# Altium PCB Power_Box_V2.PcbDoc (part 3 of 3)
Units mm, origin at the board's own origin, x right, y up, seen from the top; angles counter-clockwise.
Board outline 100 x 80 mm, 4 copper layers (Top Layer, Mid-Top, Mid-Bottom, Bottom Layer), stack 0.603 mm thick; 240 components, 204 nets, 825 pads, 313 vias.
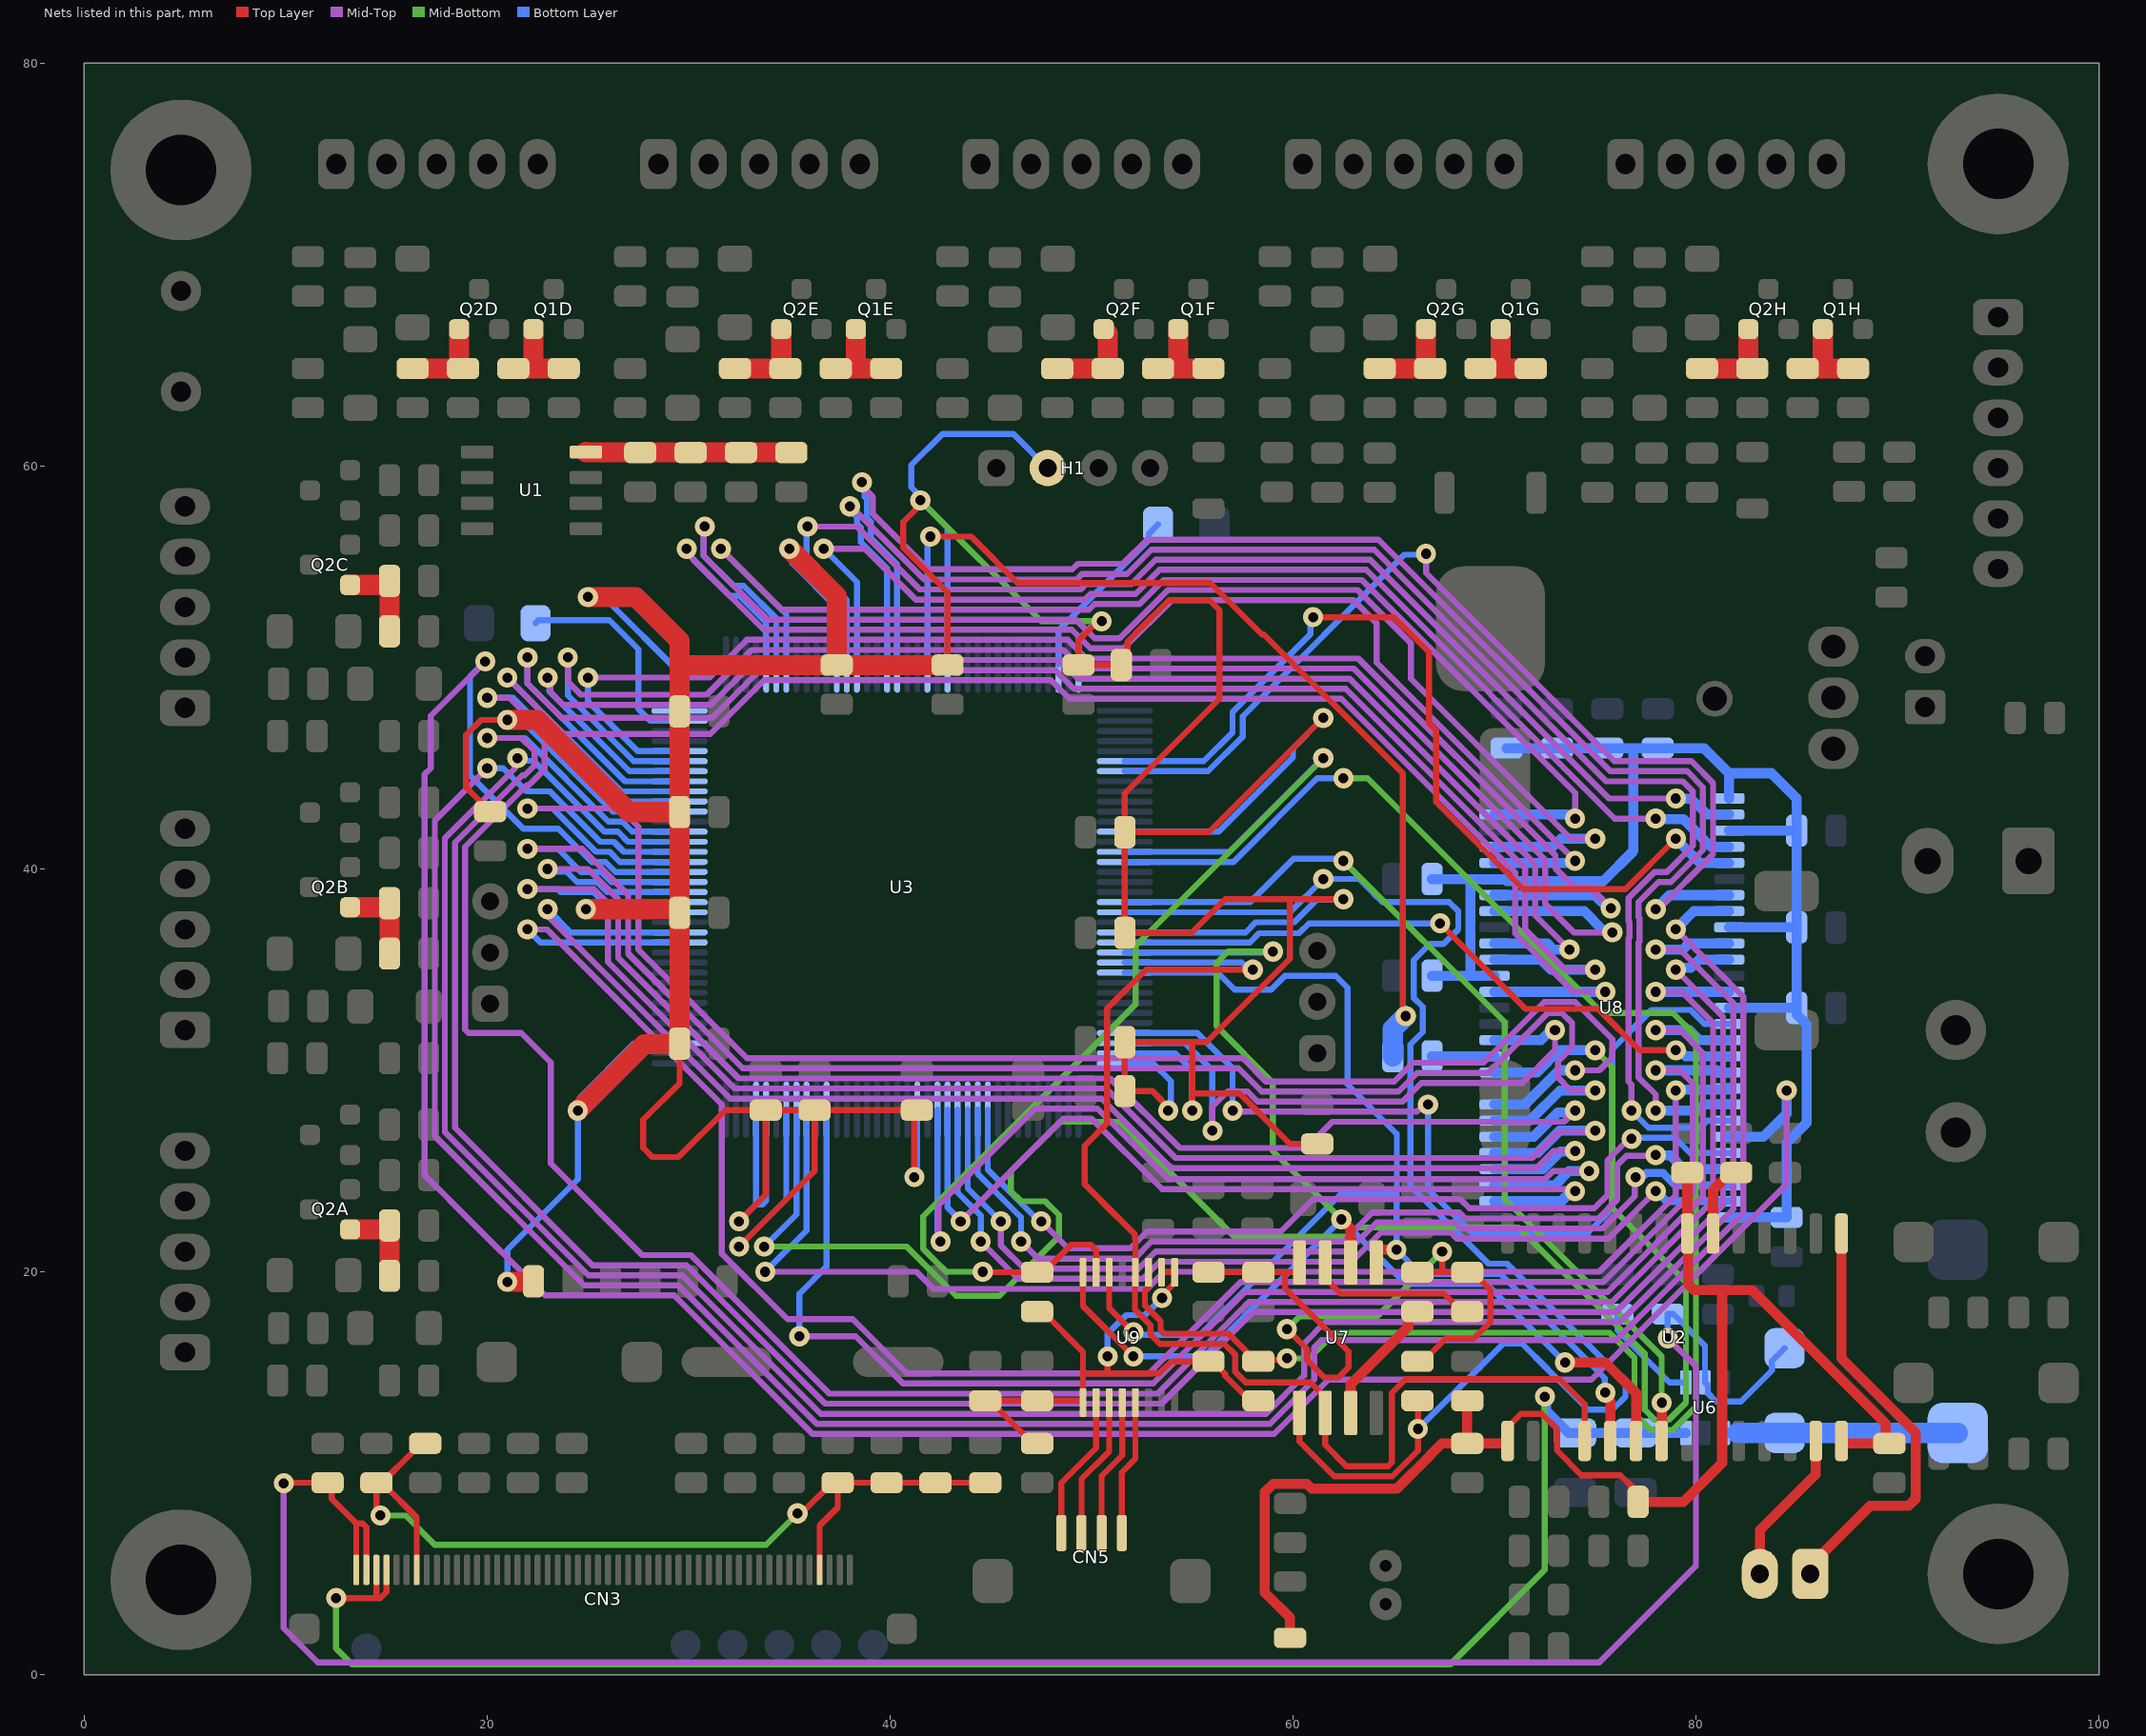
[diagram p5: the nets of this part, all layers, seen from the top]

## Via types
v1: diameter 1, hole 0.5, Top Layer to Bottom Layer, 226 vias
v2: diameter 1, hole 0.5, Top Layer to Bottom Layer, tented top, 87 vias

## Nets (pads, with @x,y where several pads share a name; then routed paths per layer and width w, separated by ;. In a path a pad name is that pad's centre, name@x,y a point inside that pad or via, vN(x,y) a via of type N, cw(c..) or ccw(c..) an arc to the next point about the centre after c; other vN are vias at no path point) (continued)
NetQ1D_2: Q1D.2 R2D.1 R3D.1 | length 4.5
  Top Layer w1: R2D.1@21.3,64.85 22.3,64.85 ; Q1D.2@22.3,66.8 22.3,64.85 ; R3D.1@23.8,64.85 22.3,64.85
NetQ1E_2: Q1E.2 R2E.1 R3E.1 | length 4.5
  Top Layer w1: R2E.1@37.3,64.85 38.3,64.85 ; Q1E.2@38.3,66.8 38.3,64.85 ; R3E.1@39.8,64.85 38.3,64.85
NetQ1F_2: Q1F.2 R2F.1 R3F.1 | length 4.5
  Top Layer w1: R2F.1@53.3,64.85 54.3,64.85 ; Q1F.2@54.3,66.8 54.3,64.85 ; R3F.1@55.8,64.85 54.3,64.85
NetQ1G_2: Q1G.2 R2G.1 R3G.1 | length 4.5
  Top Layer w1: R2G.1@69.3,64.85 70.3,64.85 ; Q1G.2@70.3,66.8 70.3,64.85 ; R3G.1@71.8,64.85 70.3,64.85
NetQ1H_2: Q1H.2 R2H.1 R3H.1 | length 4.5
  Top Layer w1: R2H.1@85.3,64.85 86.3,64.85 ; Q1H.2@86.3,66.8 86.3,64.85 ; R3H.1@87.8,64.85 86.3,64.85
NetQ2A_2: Q2A.2 R4A.2 R5A.2 | length 4.5
  Top Layer w1: Q2A.2@13.2,22.1 15.125,22.1 R4A.2@15.15,22.125 ; R5A.2@15.15,19.8 R4A.2@15.15,22.125 ; R4A.2@15.15,22.3 R4A.2@15.15,22.125
NetQ2B_2: Q2B.2 R4B.2 R5B.2 | length 4.5
  Top Layer w1: Q2B.2@13.2,38.1 15.125,38.1 R4B.2@15.15,38.125 ; R5B.2@15.15,35.8 R4B.2@15.15,38.125 ; R4B.2@15.15,38.3 R4B.2@15.15,38.125
NetQ2C_2: Q2C.2 R4C.2 R5C.2 | length 4.5
  Top Layer w1: Q2C.2@13.2,54.1 15.125,54.1 R4C.2@15.15,54.125 ; R5C.2@15.15,51.8 R4C.2@15.15,54.125 ; R4C.2@15.15,54.3 R4C.2@15.15,54.125
NetQ2D_2: Q2D.2 R4D.2 R5D.2 | length 4.5
  Top Layer w1: R5D.2@16.3,64.85 R4D.2@18.625,64.85 ; Q2D.2@18.6,66.8 18.6,64.875 R4D.2@18.625,64.85 ; R4D.2@18.8,64.85 R4D.2@18.625,64.85
NetQ2E_2: Q2E.2 R4E.2 R5E.2 | length 4.5
  Top Layer w1: R5E.2@32.3,64.85 R4E.2@34.625,64.85 ; Q2E.2@34.6,66.8 34.6,64.875 R4E.2@34.625,64.85 ; R4E.2@34.8,64.85 R4E.2@34.625,64.85
NetQ2F_2: Q2F.2 R4F.2 R5F.2 | length 4.7
  Top Layer w1: R5F.2@48.3,64.85 R4F.2@50.8,64.85 ; Q2F.2@50.6,66.8 50.8,66.6 R4F.2@50.8,64.85 ; R4F.2@50.975,64.85 R4F.2@50.8,64.85
NetQ2G_2: Q2G.2 R4G.2 R5G.2 | length 4.5
  Top Layer w1: R5G.2@64.3,64.85 R4G.2@66.625,64.85 ; Q2G.2@66.6,66.8 66.6,64.875 R4G.2@66.625,64.85 ; R4G.2@66.8,64.85 R4G.2@66.625,64.85
NetQ2H_2: Q2H.2 R4H.2 R5H.2 | length 4.5
  Top Layer w1: R5H.2@80.3,64.85 R4H.2@82.625,64.85 ; Q2H.2@82.6,66.8 82.6,64.875 R4H.2@82.625,64.85 ; R4H.2@82.8,64.85 R4H.2@82.625,64.85
NetR13_1: R13.1 U2.20 | length 3.7
  Top Layer w0.5: U2.20@80.85,21.9 80.85,24.05 81.725,24.925 R13.1@82,24.925
NetR53_1: R53.1 U6.4 | length 5.3
  Bottom Layer w0.3: R53.1@76.1,17.9 76.1,17.1 78.69,14.51 U6.4@79.5,14.51
NetR56_1: R56.1 U3.129 U7.1 | length 73.4
  Top Layer w0.3: U7.1@60.322,12.998 60.322,11.578 62.05,9.85 64.931,9.85 66.2,11.119 66.2,13.575 R56.1@66.175,13.6
  Bottom Layer w0.3: U3.129@51.65,37.85 59.85,37.85 v1(61.5,39.5) 63.3,39.5 64.017,38.783 64.017,38.767 64.434,38.35 67.75,38.35 68.2,37.9 68.2,36.998 67.472,36.27 66.803,36.27 66,35.466 66,33.591 66.44,33.151 66.44,31.906 65.825,31.291 65.825,24.275 69.7,20.4 70.625,20.4 76.5,14.525 76.5,13.798 75.852,13.15 74.652,13.15 73.152,14.65 73.148,14.65 72.65,15.148 72.65,15.152 71.352,16.45 70.45,16.45 v2(66.2,12.2)
NetR57_1: R57.1 U7.3 | length 6.5
  Top Layer w0.5: U7.3@62.862,12.998 62.862,14.412 65.721,17.271 65.721,17.658 66.087,18.025 R57.1@66.175,18.025
NetR58_1: R58.1 U7.7 | length 8.5
  Top Layer w0.3: U7.7@61.592,20.452 61.592,19.677 62.353,18.916 67.485,18.916 68.377,18.025 R58.1@68.652,18.025
NetR59_1: R59.1 U3.93 | length 49.1
  Top Layer w0.3: v1(42,56.5) 44.025,56.5 46.325,54.2 55.898,54.2 58.448,51.65 58.552,51.65 65.45,44.752 65.45,33.493 65.456,33.487 65.456,32.829 v1(65.59,32.695)
  Bottom Layer w0.3: U3.93@41.85,50.15 41.85,56.161 42,56.311 v1(42,56.5)
  Bottom Layer w1: R59.1@64.95,30.7 64.95,32.055 v1(65.59,32.695)
NetR59_2: R59.2 U8.38 | length 3.1
  Bottom Layer w0.5: R59.2@66.9,30.7 U8.38@70,30.7
NetR60_1: R60.1 U3.124 U9.11 | length 89
  Top Layer w0.3: U9.11@52.825,19.975 52.8,19.95 52.8,19.202 52.65,19.052 52.65,18.334 53.425,17.559 53.425,17.101 53.601,16.925 56.798,16.925 57.696,16.027 57.696,15.917 58.062,15.55 R60.1@58.277,15.55 58.351,15.625 59.625,15.625 v2(59.7,15.7)
  Mid-Bottom w0.3: v2(59.7,15.7) 60.798,15.7 62.073,16.975 75.707,16.975 76.95,15.732 76.95,12.941 77.741,12.15 78.859,12.15 80,13.291 80,31.7 78.85,32.85 75.348,32.85 63.698,44.5 v1(62.5,44.5)
  Bottom Layer w0.3: U3.124@51.65,40.35 57.042,40.35 61.192,44.5 v1(62.5,44.5)
NetR61_1: R61.1 U3.123 U9.15 | length 55.2
  Top Layer w0.3: v1(44.6,20) 44.625,19.975 47.625,19.975 49,21.35 49.95,21.35 50.225,21.075 U9.15@50.225,19.975
  Mid-Bottom w0.3: v1(44.6,20) 42.782,20 41.65,21.132 41.65,22.75 52.183,33.283 52.183,36.183 v1(61.5,45.5)
  Bottom Layer w0.3: U3.123@51.65,40.85 56.835,40.85 61.485,45.5 v1(61.5,45.5)
NetU2_4: U2.4 U3.134 U7.2 U9.12 | length 64.9
  Top Layer w0.3: v1(58,35) 52.7,35 50.775,33.075 50.775,27.375 49.65,26.25 49.65,24.35 50.45,23.55 50.45,23.548 52.15,21.848 52.15,21.626 52.175,21.601 U9.12@52.175,19.975 52.15,19.95 52.15,18.141 52.175,18.116 52.175,18.102 52.925,17.352 52.925,16.894 53.394,16.425 56.591,16.425 57.127,15.89 57.127,15.034 57.661,14.5 60.864,14.5 61.592,13.773 61.592,11.408 62.65,10.35 64.724,10.35 64.9,10.526 64.9,13.991 65.584,14.675 73.225,14.675 74.475,13.425 U2.4@74.475,11.6
  Bottom Layer w0.3: U3.134@51.65,35.35 57.461,35.35 57.811,35 v1(58,35)
NetU2_5: U2.5 U3.135 U7.5 U9.14 | length 63.2
  Top Layer w0.3: U9.14@50.875,19.975 50.875,18.2 v2(52.075,17)
  Top Layer w0.5: U7.5@64.132,20.452 64.132,20.917 64.307,21.092 v2(65.134,21.092) ; v1(75.5,14) 75.5,13.811 75.75,13.561 U2.5@75.75,11.6
  Bottom Layer w0.3: U3.135@51.65,34.85 56.25,34.85 57.1,34 58.91,34 59.6,34.69 62.11,34.69 62.7,34.1 62.7,29.302 65.15,26.852 65.15,23.816 65.134,23.8 65.134,23.679 ; v2(52.075,17) 52.209,16.866 55.373,16.866 62.307,23.8 65.013,23.8 65.134,23.679 ; v1(75.5,14) 75.479,14.021 75.479,14.723 73.852,16.35 73.843,16.35 70.293,19.9 66.326,19.9 v2(65.134,21.092) 65.134,23.679
NetU2_6: U2.6 U3.133 U7.6 U9.16 | length 67
  Top Layer w0.3: U9.16@49.575,19.975 49.575,18.298 52.073,15.8 v1(52.075,15.8)
  Top Layer w0.5: v2(62.4,22.6) 62.862,22.138 U7.6@62.862,20.452 ; v1(73.5,15.5) 75.5,15.5 77.025,13.975 U2.6@77.025,11.6
  Mid-Bottom w0.3: v1(59,35.9) 56.776,35.9 56.2,35.324 56.2,32.2 59,29.4 59,26 v2(62.4,22.6)
  Bottom Layer w0.3: U3.133@51.65,35.85 58.95,35.85 v1(59,35.9) ; v1(52.075,15.8) 55.6,15.8 v2(62.4,22.6) 65.6,19.4 69.6,19.4 71.726,17.274 v1(73.5,15.5)
NetU2_7: U2.7 U3.128 | length 47.1
  Top Layer w0.5: U2.7@78.3,11.6 v2(78.3,13.5)
  Mid-Bottom w0.3: v1(62.5,40.4) 70.5,32.4 70.5,23.598 78.3,15.798 v2(78.3,13.5)
  Bottom Layer w0.3: U3.128@51.65,38.35 57.871,38.35 60.021,40.5 62.4,40.5 v1(62.5,40.4)
NetU3_10: U3.10 U8.23 | length 45.3
  Mid-Top w0.3: v1(47.5,22.5) 48.825,21.175 51.925,21.175 52.75,22 59.402,22 61.002,23.6 68.3,23.6 68.75,23.15 74.95,23.15 75.6,23.8 75.6,25.528 75.95,25.878 v1@76.747,26.675
  Bottom Layer w0.3: U3.10@44.85,28.05 44.85,25.059 47.409,22.5 v1(47.5,22.5) ; v1(76.8,26.6) 76.85,26.65 78.95,26.65 79.7,25.9 U8.23@81.65,25.9
NetU3_11: U3.11 U8.24 | length 46.6
  Mid-Top w0.3: v1(46.5,21.5) 47.35,20.65 52.125,20.65 52.975,21.5 62.502,21.5 63.944,22.942 68.251,22.942 68.543,22.65 75.157,22.65 76.1,23.593 76.1,25.302 76.548,25.75 77.95,25.75 v1(78,25.8)
  Bottom Layer w0.3: U3.11@44.35,28.05 44.35,24.85 45.85,23.35 45.852,23.35 46.35,22.852 46.35,22.85 46.5,22.7 v1(46.5,21.5)
  Bottom Layer w0.5: v1(78,25.8) 78.028,25.772 78.728,25.772 79.4,25.1 U8.24@81.65,25.1
NetU3_12: U3.12 U8.25 | length 47.1
  Mid-Top w0.3: v1(45.5,22.5) 45.5,21.298 46.648,20.15 52.334,20.15 53.184,21 62.709,21 64.151,22.442 68.044,22.442 68.336,22.15 75.364,22.15 76.964,23.75 76.964,24.664 v1(77,24.7)
  Bottom Layer w0.3: U3.12@43.85,28.05 43.85,24.15 v1(45.5,22.5)
  Bottom Layer w0.4: v1(77,24.7) 77.115,24.815 77.449,24.815 77.534,24.9 78.373,24.9 78.973,24.3 U8.25@81.65,24.3
NetU3_13: U3.13 U8.26 | length 47.2
  Mid-Top w0.3: v1(44.5,21.5) 46.35,19.65 52.541,19.65 53.391,20.5 62.916,20.5 64.358,21.942 67.837,21.942 68.129,21.65 75.65,21.65 v1(78,24)
  Bottom Layer w0.3: U3.13@43.35,28.05 43.35,23.943 44.5,22.793 v1(44.5,21.5)
  Bottom Layer w0.4: v1(78,24) 78.043,24 78.543,23.5 U8.26@81.65,23.5
NetU3_14: U3.14 U8.29 | length 44.1
  Mid-Top w0.3: v1(43.5,22.5) 48.6,27.6 50.002,27.6 53.502,24.1 73.9,24.1 v1(74,24)
  Bottom Layer w0.3: U3.14@42.85,28.05 42.85,23.194 43.5,22.544 v1(43.5,22.5)
  Bottom Layer w0.5: U8.29@70,23.5 73.311,23.5 73.811,24 v1(74,24)
NetU3_15: U3.15 U8.30 | length 49.3
  Mid-Top w0.3: v1(42.5,21.5) 42.4,21.6 42.4,23.3 47.2,28.1 50.3,28.1 53.291,25.109 53.8,24.6 72.507,24.6 72.907,25 v1(74.7,25)
  Bottom Layer w0.3: U3.15@42.35,28.05 42.35,22.026 42.366,22.01 42.366,21.634 v1(42.5,21.5)
  Bottom Layer w0.5: U8.30@70,24.3 73.007,24.3 73.707,25 v1(74.7,25)
NetU3_26: U3.26 U8.16 | length 75.3
  Mid-Top w0.3: v1(35.5,16.8) 38.291,16.8 40.641,14.45 53.059,14.45 57.609,19 75.616,19 80.35,23.734 80.35,30.852 79.202,32 v1(78,32)
  Bottom Layer w0.3: v1(35.5,16.8) 35.5,18.909 36.85,20.259 U3.26@36.85,28.05
  Bottom Layer w0.5: v1(78,32) 79.675,32 80.175,31.5 U8.16@81.65,31.5
NetU3_28: U3.28 U8.19 | length 64.3
  Mid-Top w0.3: v1(33.8,20) 41.306,20 42.156,19.15 52.748,19.15 53.598,20 75.202,20 79,23.798 v1(79,29)
  Bottom Layer w0.3: v1(33.8,20) 33.8,20.002 35.85,22.052 U3.28@35.85,28.05
  Bottom Layer w0.5: v1(79,29) 79.05,29.05 81.6,29.05 U8.19@81.65,29.1
NetU3_29: U3.29 U8.37 | length 97.1
  Mid-Bottom w0.3: v1(33.75,21.25) 40.825,21.25 43.275,18.8 45.425,18.8 48.375,21.75 48.375,22.827 47.702,23.5 46.5,23.5 46,24 46,25 48.45,27.45 51.375,27.45 57.075,21.75 62.752,21.75 63.202,22.2 71.189,22.2 77.45,15.939 77.45,13.148 77.948,12.65 78.652,12.65 79.5,13.498 79.5,19.5 75.85,23.15 75.85,30.15 v1(75,31)
  Bottom Layer w0.3: v1(33.75,21.25) 35.35,22.85 U3.29@35.35,28.05
  Bottom Layer w0.5: U8.37@70,29.9 72.105,29.9 73.205,31 v1(75,31)
NetU3_49: U3.49 U8.18 | length 94.1
  Mid-Top w0.3: v2(22,37) 22.962,37 31.65,28.312 31.65,20.898 34.898,17.65 38.148,17.65 40.848,14.95 52.852,14.95 57.402,19.5 75.409,19.5 79.85,23.941 79.85,29.352 79.202,30 v1(78,30)
  Bottom Layer w0.3: v2(22,37) 22.65,36.35 U3.49@29.55,36.35
  Bottom Layer w0.5: v1(78,30) 81.05,30 81.15,29.9 U8.18@81.65,29.9
NetU3_50: U3.50 U8.31 | length 68.3
  Mid-Top w0.3: v2(23,38) 23.134,37.866 23.134,37.536 32.07,28.6 50.507,28.6 53.957,25.15 72.082,25.15 72.932,26 v1(74,26)
  Bottom Layer w0.3: v2(23,38) 24.15,36.85 U3.50@29.55,36.85
  Bottom Layer w0.5: U8.31@70,25.1 72.4,25.1 73.266,25.966 73.966,25.966 v1(74,26)
NetU3_53: U3.53 U8.32 | length 74.1
  Mid-Top w0.3: v2(22,39) 25.3,39 26,38.3 26,35.377 32.277,29.1 50.714,29.1 54.164,25.65 71.875,25.65 73.175,26.95 74.95,26.95 v1(75,27)
  Bottom Layer w0.3: v2(22,39) 23.49,39 23.64,38.85 25.252,38.85 25.752,38.35 U3.53@29.55,38.35
  Bottom Layer w0.5: U8.32@70,25.9 72.13,25.9 73.23,27 v1(75,27)
NetU3_54: U3.54 U8.33 | length 70.8
  Mid-Top w0.3: v2(23,40) 25.007,40 26.5,38.507 26.5,35.584 32.484,29.6 50.921,29.6 54.371,26.15 60.65,26.15 61.95,27.45 73.45,27.45 v1(74,28)
  Bottom Layer w0.3: v2(23,40) 23.134,39.866 23.933,39.866 24.449,39.35 25.059,39.35 25.459,39.35 25.959,38.85 U3.54@29.55,38.85
  Bottom Layer w0.5: U8.33@70,26.7 71.94,26.7 73.144,27.904 73.904,27.904 v1(74,28)
NetU3_55: U3.55 U8.34 | length 79.3
  Mid-Top w0.3: v2(22,41) 24.714,41 27,38.714 27,35.791 32.691,30.1 57.293,30.1 58.443,28.95 65.232,28.95 66.157,29.875 69.673,29.875 72.648,32.85 73.352,32.85 73.85,32.352 73.85,31.143 73.15,30.443 73.15,29.648 73.798,29 v1(75,29)
  Bottom Layer w0.3: v2(22,41) 23.506,41 24.656,39.85 25.266,39.85 25.666,39.85 26.166,39.35 U3.55@29.55,39.35
  Bottom Layer w0.5: U8.34@70,27.5 71.75,27.5 73.25,29 v1(75,29)
NetU3_56: U3.56 U8.22 | length 132.3
  Mid-Top w0.3: v2(19.9,50.3) 17.2,47.6 17.2,45.005 16.9,44.705 16.9,24.8 18.15,23.55 18.15,23.548 18.648,23.05 18.65,23.05 22.875,18.825 29.275,18.825 36.15,11.95 59.064,11.95 61.764,14.65 72.852,14.65 74.802,14.65 84.5,24.348 v1(84.5,29)
  Bottom Layer w0.3: v2(19.9,50.3) 19.15,49.55 19.15,44.648 21.798,42 23.543,42 25.193,40.35 25.473,40.35 25.873,40.35 26.373,39.85 U3.56@29.55,39.85
  Bottom Layer w0.5: U8.22@81.65,26.7 83.35,26.7 84.5,27.85 v1(84.5,29)
NetU3_57: U3.57 U8.35 | length 81.8
  Mid-Top w0.3: v1(22,43) 26.6,43 27.5,42.1 27.5,35.998 32.898,30.6 57.5,30.6 58.65,29.45 65.025,29.45 65.95,30.375 69.45,30.375 72.475,33.4 74,33.4 75.85,31.55 75.85,30.648 75.202,30 v1(74,30)
  Bottom Layer w0.3: v1(22,43) 23.25,43 25.4,40.85 25.68,40.85 26.08,40.85 26.58,40.35 U3.57@29.55,40.35
  Bottom Layer w0.5: U8.35@70,28.3 71.5,28.3 73.2,30 v1(74,30)
NetU3_58: U3.58 U8.8 | length 125.3
  Mid-Top w0.3: v2(20,45) 17.4,42.4 17.4,26.736 24.811,19.325 29.482,19.325 36.357,12.45 58.857,12.45 61.05,14.643 61.05,16.243 61.407,16.6 76.045,16.6 82.35,22.905 82.35,33.65 v1(79,37)
  Bottom Layer w0.3: v2(20,45) 20.798,45 21.948,43.85 23.107,43.85 25.607,41.35 25.888,41.35 26.288,41.35 26.788,40.85 U3.58@29.55,40.85
  Bottom Layer w0.5: v1(79,37) 79.9,37.9 U8.8@81.65,37.9
NetU3_59: U3.59 U8.10 | length 123.7
  Mid-Top w0.3: v1(21.5,45.5) 21.366,45.366 21.366,44.982 17.9,41.516 17.9,26.943 25.018,19.825 29.689,19.825 36.564,12.95 58.65,12.95 60.55,14.85 60.55,16.45 61.6,17.5 76.238,17.5 81.85,23.112 81.85,33.352 79.202,36 v1(78,36)
  Bottom Layer w0.3: v1(21.5,45.5) 21.634,45.366 22.298,45.366 25.814,41.85 26.095,41.85 26.495,41.85 26.995,41.35 U3.59@29.55,41.35
  Bottom Layer w0.5: v1(78,36) 79.344,36 79.644,36.3 U8.10@81.65,36.3
NetU3_60: U3.60 U8.11 | length 122.7
  Mid-Top w0.3: v2(20,46.5) 21.702,46.5 22.35,45.852 22.35,45.148 21.849,44.646 21.737,44.646 18.4,41.309 18.4,27.15 25.225,20.325 29.896,20.325 36.771,13.45 53.473,13.45 58.023,18 76.03,18 81.35,23.319 81.35,32.65 v1(79,35)
  Bottom Layer w0.3: v2(20,46.5) 21.872,46.5 26.022,42.35 26.302,42.35 26.702,42.35 27.202,41.85 U3.60@29.55,41.85
  Bottom Layer w0.5: v1(79,35) 79.096,35.096 79.746,35.096 80.15,35.5 U8.11@81.65,35.5
NetU3_63: U3.63 U8.13 | length 124
  Mid-Top w0.3: v1(20,48.5) 21.102,48.5 22.85,46.752 22.85,44.941 22.056,44.146 21.944,44.146 18.9,41.102 18.9,32.026 19.076,31.85 21.684,31.85 23.15,30.384 23.15,25.377 27.702,20.825 30.103,20.825 36.978,13.95 53.266,13.95 57.816,18.5 75.823,18.5 80.85,23.527 80.85,32.352 79.302,33.9 v1(78,33.9)
  Bottom Layer w0.3: v1(20,48.5) 21.286,48.5 26.436,43.35 U3.63@29.55,43.35
  Bottom Layer w0.5: v1(78,33.9) U8.13@81.65,33.9
NetU3_64: U3.64 U8.42 | length 81.3
  Mid-Top w0.3: v2(21,49.5) 23.8,46.7 31.071,46.7 33.746,49.375 47.98,49.375 48.905,48.45 62.4,48.45 71.025,39.825 71.025,36.791 73.916,33.9 v1(75.5,33.9)
  Bottom Layer w0.3: v2(21,49.5) 21,49.493 26.643,43.85 U3.64@29.55,43.85
  Bottom Layer w0.5: U8.42@70,33.9 v1(75.5,33.9)
NetU3_65: U3.65 U8.44 | length 80
  Mid-Top w0.3: v1(22,50.5) 22,49.207 23.707,47.5 31.164,47.5 33.539,49.875 48.187,49.875 49.112,48.95 62.607,48.95 71.525,40.032 71.525,36.998 73.523,35 v1(75,35)
  Bottom Layer w0.3: v1(22,50.5) 22,49.2 26.85,44.35 U3.65@29.55,44.35
  Bottom Layer w0.5: U8.44@70,35.5 72.3,35.5 72.8,35 v1(75,35)
NetU3_66: U3.66 U8.45 | length 72.7
  Mid-Top w0.3: v1(23,49.5) 23.134,49.366 23.134,48.791 23.775,48.15 31.107,48.15 33.332,50.375 48.394,50.375 49.32,49.45 62.814,49.45 72.025,40.239 72.025,37.7 v1(73.725,36)
  Bottom Layer w0.3: v1(23,49.5) 23.075,49.425 23.075,48.832 27.057,44.85 U3.66@29.55,44.85
  Bottom Layer w0.5: U8.45@70,36.3 72.625,36.3 72.925,36 v1(73.725,36)
NetU3_67: U3.67 U8.47 | length 76.4
  Mid-Top w0.3: v1(24,50.5) 24,49.298 24.648,48.65 30.9,48.65 33.125,50.875 48.602,50.875 49.527,49.95 63.021,49.95 72.525,40.446 72.525,38.273 73.948,36.85 v1(75.85,36.85)
  Bottom Layer w0.3: v1(24,50.5) 24,48.614 27.264,45.35 U3.67@29.55,45.35
  Bottom Layer w0.5: U8.47@70,37.9 74.45,37.9 75.404,36.946 75.754,36.946 v1(75.85,36.85)
NetU3_68: U3.68 U8.48 | length 70.2
  Mid-Top w0.3: v1(25,49.5) 31.025,49.5 32.9,51.375 48.809,51.375 49.734,50.45 63.241,50.45 73.025,40.666 73.025,40.025 73.946,39.104 74.721,39.104 v1(75.775,38.05)
  Bottom Layer w0.3: v1(25,49.5) 25,48.321 27.471,45.85 U3.68@29.55,45.85
  Bottom Layer w0.5: U8.48@70,38.7 74.99,38.7 75.64,38.05 v1(75.775,38.05)
NetU3_77: U3.77 U8.50 | length 65.5
  Mid-Top w0.3: v1(29.9,55.9) 29.9,55.711 30.25,55.361 30.25,55.341 33.716,51.875 49.016,51.875 49.941,50.95 51.602,50.95 54.002,53.35 63,53.35 64.15,52.2 64.15,50.248 64.648,49.75 64.65,49.75 v1(74,40.4)
  Bottom Layer w0.3: v1(29.9,55.9) 29.9,55.724 30.25,55.374 30.25,55.341 32.041,53.55 32.528,53.55 33.85,52.228 33.85,52.212 U3.77@33.85,50.15
  Bottom Layer w0.5: U8.50@70,40.3 73.9,40.3 v1(74,40.4)
NetU3_78: U3.78 U8.51 | length 68.4
  Mid-Top w0.3: v2(30.8,57) 30.75,56.95 30.75,55.548 33.923,52.375 49.223,52.375 50.148,51.45 51.395,51.45 53.795,53.85 63.207,53.85 65.85,51.207 65.85,49.448 73.798,41.5 v1(75,41.5)
  Bottom Layer w0.3: v2(30.8,57) 30.75,56.95 30.75,55.548 32.248,54.05 32.736,54.05 34.35,52.436 U3.78@34.35,50.15
  Bottom Layer w0.5: U8.51@70,41.1 72.893,41.1 73.293,41.5 v1(75,41.5)
NetU3_79: U3.79 U8.53 | length 61.1
  Mid-Top w0.3: v1(31.6,55.9) 34.625,52.875 49.873,52.875 50.148,53.15 51.845,53.15 52.388,53.15 53.588,54.35 63.414,54.35 74,43.764 v1(74,42.5)
  Bottom Layer w0.3: v1@31.6,55.893 34.85,52.643 34.85,52.627 U3.79@34.85,50.15
  Bottom Layer w0.5: U8.53@70,42.7 73.611,42.7 73.811,42.5 v1(74,42.5)
NetU3_85: U3.85 U8.2 | length 60.6
  Mid-Top w0.3: v2(35.9,57) 38.357,57 41.482,53.875 49.459,53.875 49.734,54.15 51.431,54.15 51.973,54.15 53.173,55.35 63.829,55.35 75.679,43.5 v1(79,43.5)
  Bottom Layer w0.3: v2(35.9,57) 35.85,56.95 35.85,55.35 37.85,53.35 U3.85@37.85,50.15
  Bottom Layer w0.5: v1(79,43.5) 79.009,43.491 79.759,43.491 80.55,42.7 U8.2@81.65,42.7
NetU3_86: U3.86 U8.4 | length 58.7
  Mid-Top w0.3: v1(36.7,55.9) 38.75,55.9 41.275,53.375 49.666,53.375 49.941,53.65 51.638,53.65 52.18,53.65 53.38,54.85 63.622,54.85 75.972,42.5 v1(78,42.5)
  Bottom Layer w0.3: v1(36.7,55.9) 38.35,54.25 U3.86@38.35,50.15
  Bottom Layer w0.5: v1(78,42.5) 78.021,42.479 79.364,42.479 80.744,41.1 U8.4@81.65,41.1
NetU3_89: U3.89 U8.21 | length 80.5
  Mid-Top w0.3: v1(38,58) 38.064,58 41.689,54.375 49.252,54.375 49.527,54.65 51.224,54.65 51.766,54.65 52.966,55.85 64.036,55.85 75.536,44.35 79.352,44.35 79.85,43.852 79.85,41.148 78.556,39.854 77.944,39.854 76.65,38.559 76.65,37.402 76.7,37.352 76.7,36.609 76.65,36.559 76.65,29.441 76.8,29.291 v1(76.8,28)
  Bottom Layer w0.3: v1(38,58) 38,57.811 38.35,57.461 38.35,57.155 38.55,56.955 38.55,56.236 39.85,54.936 U3.89@39.85,50.15 ; v1(76.8,28) 76.8,27.998 77.648,27.15 80.225,27.15 80.575,27.5 U8.21@81.65,27.5
NetU3_90: U3.90 U8.20 | length 81.5
  Mid-Top w0.3: v1(38.6,59.2) 38.6,59.011 39.15,58.461 39.15,57.621 41.896,54.875 49.045,54.875 49.32,55.15 51.017,55.15 51.559,55.15 52.759,56.35 64.243,56.35 75.743,44.85 79.559,44.85 80.35,44.059 80.35,40.941 78.763,39.354 78.151,39.354 77.15,38.352 77.15,37.609 77.2,37.559 77.2,36.402 77.15,36.352 77.15,29.648 78,28.798 v1(78,28)
  Bottom Layer w0.3: v1(38.6,59.2) 38.734,59.066 38.734,58.468 38.85,58.352 38.85,57.441 39.05,57.241 39.05,56.443 40.35,55.143 U3.90@40.35,50.15
  Bottom Layer w0.5: v1(78,28) 80.1,28 80.4,28.3 U8.20@81.65,28.3
NetU3_114: U3.114 U8.5 | length 45.2
  Top Layer w0.3: v1(61,52.5) 65.007,52.5 65.557,51.95 65.559,51.95 66.75,50.759 66.75,47.218 67.1,46.868 67.1,43.327 71.427,39 76.5,39 v1(79,41.5)
  Bottom Layer w0.3: U3.114@51.65,45.35 53.765,45.35 55.571,45.35 57,46.779 57,47.786 60.866,51.652 60.866,52.366 v1(61,52.5)
  Bottom Layer w0.5: v1(79,41.5) 80.2,40.3 U8.5@81.65,40.3
NetU3_115: U3.115 U8.7 | length 51
  Mid-Top w0.3: v1(66.6,55.65) 66.6,54.7 75.95,45.35 79.766,45.35 80.85,44.266 80.85,40.734 78.116,38 v1(78,38)
  Bottom Layer w0.3: U3.115@51.65,44.85 53.972,44.85 55.778,44.85 57.5,46.572 57.5,47.579 65.521,55.6 66.55,55.6 v1(66.6,55.65)
  Bottom Layer w0.5: v1(78,38) 78.7,38.7 U8.7@81.65,38.7
NetU3_132: U3.132 U8.17 | length 33.1
  Top Layer w0.3: v1(67.3,37.3) 71.55,33.05 75.15,33.05 77.2,31 v1(79,31)
  Bottom Layer w0.3: U3.132@51.65,36.35 57.857,36.35 58.315,36.808 60.3,36.808 60.792,37.3 v1(67.3,37.3)
  Bottom Layer w0.5: v1(79,31) 79.189,31 79.489,30.7 U8.17@81.65,30.7
NetU3_141: U3.141 U8.15 | length 47.7
  Mid-Top w0.3: v1(57,28) 57.05,27.95 66.161,27.95 66.511,28.3 v1(66.7,28.3)
  Bottom Layer w0.3: U3.141@51.65,31.85 55.25,31.85 57,30.1 v1(57,28) ; v1(66.7,28.3) 66.7,24.107 68.957,21.85 74.55,21.85 75.85,23.15 75.85,31.052 77.798,33 79.725,33 80.425,32.3 U8.15@81.65,32.3
NetU3_142: U3.142 U8.39 | length 31.9
  Mid-Top w0.3: v2(56,27) 56,28.202 56.748,28.95 57.736,28.95 58.236,28.45 65.439,28.45 66.364,29.375 71.375,29.375 73,31 v1(73,32)
  Bottom Layer w0.3: U3.142@51.65,31.35 54.65,31.35 56,30 v2(56,27)
  Bottom Layer w0.5: U8.39@70,31.5 72.311,31.5 72.811,32 v1(73,32)
SPK_N: CN2.2 U2.13 | length 7.7
  Top Layer w0.5: CN2.2@83.175,5 83.175,7.175 85.95,9.95 U2.13@85.95,11.6
SPK_P: CN2.1 U2.15 | length 21.7
  Top Layer w0.5: CN2.1@85.675,5 85.675,5.4 88.65,8.375 90.55,8.375 90.9,8.725 90.9,12.025 87.225,15.7 U2.15@87.225,21.9
SW: D4.1 L1.2 U6.1 | length 11.6
  Bottom Layer w0.5: U6.1@81.4,12 82.05,12
  Bottom Layer w1: 82.05,12 D4.1@84.4,12 L1.2@93,12
V_CAP_1: C32.1 U3.71 | length 11
  Bottom Layer w0.3: C32.1@22.4,52.2 22.55,52.35 26.059,52.35 27.5,50.909 27.5,47.943 28.093,47.35 U3.71@29.55,47.35
V_CAP_2: C37.1 U3.106 | length 9
  Bottom Layer w0.3: U3.106@48.35,50.15 48.35,51.843 52.839,56.332 52.839,56.639 C37.1@53.3,57.1
V_LED+: C48.1 C49.1 CN3.1 CN3.2 D4.2 U6.5 | length 113.1
  Top Layer w0.3: v1(9.9,9.5) 9.925,9.525 C49.1@12.075,9.525 12.274,9.326 12.274,8.726 13.5,7.5 ; CN3.1@13.5,5.2 13.5,7.5 ; CN3.2@14,5.2 14,7.324 13.824,7.5 13.5,7.5
  Mid-Top w0.3: v1(9.9,9.5) 9.9,2.3 11.6,0.6 75.2,0.6 80,5.4 80,15.3 v1(78.6,16.7)
  Bottom Layer w0.3: v1(78.6,16.7) C48.1@78.6,17.9 78.875,17.9 80.45,16.325 U6.5@80.45,14.51 80.59,14.37 80.59,13.972 81.007,13.555 82.23,13.555 83.766,15.091 83.766,15.566 D4.2@84.4,16.2
V_LED-: CN3.3 CN3.4 R54.1 R55.1 U6.3 | length 86.7
  Top Layer w0.3: v1(12.5,3.8) 14.5,3.8 14.7,3.8 15,4.1 CN3.4@15,5.2 ; 14.4,3.8 14.5,3.9 CN3.3@14.5,5.2
  Mid-Bottom w0.3: v1(12.5,3.8) 12.5,1.3 13.3,0.5 67.8,0.5 72.5,5.2 v2(72.5,13.8)
  Bottom Layer w0.5: v2(72.5,13.8) 72.558,13.742 72.558,13.117 73.675,12 R55.1@77,12 U6.3@79.5,12
VCC_EEPROM: C3.1 FB1.1 R8.1 R9.1 U1.8 | length 10.2
  Top Layer w1: U1.8@24.9,60.7 24.912,60.688 35.083,60.688 FB1.1@35.095,60.675
VCC_IS42: C51.2 C52.2 C53.2 C54.2 C55.2 C56.2 C57.2 C58.2 FB7.2 FB8.2 U8.1 U8.3 U8.9 U8.14 U8.27 U8.43 U8.49 | length 74.7
  Bottom Layer w0.5: C57.2@66.9,34.7 68.8,34.7 ; C56.2@66.9,39.5 68.8,39.5 ; U8.43@70,34.7 68.8,34.7 ; FB8.2@70.6,46 FB7.2@73.1,46 C58.2@75.6,46 76.9,46 ; U8.27@81.65,22.7 C55.2@84.5,22.7 84.5,26.4 85.5,27.4 85.5,32.274 85,32.774 C52.2@85,33.1 ; U8.14@81.65,33.1 C52.2@85,33.1 ; U8.9@81.65,37.1 C51.2@85,37.1 ; U8.3@81.65,41.9 C54.2@85,41.9 ; U8.1@81.65,43.5 81.65,44.75 ; 68.8,34.7 68.8,39.5 ; 68.8,39.5 70.5,39.5 70.6,39.4 75.4,39.4 76.9,40.9 76.9,46 ; 76.9,46 C53.2@78.1,46 80.4,46 81.65,44.75 ; 81.65,44.75 83.75,44.75 85,43.5 C54.2@85,41.9 ; C52.2@85,33.1 C51.2@85,37.1 ; C51.2@85,37.1 C54.2@85,41.9
VCC_ISD: C8.1 C9.1 C10.1 FB2.2 LED1.1 R11.1 U2.1 U2.14 U2.21 | length 68.7
  Top Layer w0.3: U2.1@70.65,11.6 70.65,12.287 71.313,12.95 72.35,12.95 73.1,12.2 73.1,11.118 74.318,9.9 76.25,9.9 76.858,9.292 76.858,8.842 R11.1@77.125,8.575
  Top Layer w0.5: LED1.1@59.85,1.825 59.85,2.835 58.6,4.085 58.6,9.058 59.017,9.475 60.683,9.475 60.933,9.225 65.155,9.225 66.8,10.87 66.8,10.886 67.389,11.475 C9.1@68.648,11.475 70.525,11.475 U2.1@70.65,11.6 ; C9.1@68.648,11.475 FB2.2@68.649,13.599 ; R11.1@77.125,8.575 79.375,8.575 81.3,10.5 81.3,19 81.4,19.1 ; C10.1@79.575,24.925 U2.21@79.575,21.9 79.6,21.875 79.6,19.4 79.9,19.1 81.4,19.1 ; U2.14@87.225,11.6 87.35,11.475 C8.1@89.6,11.475 89.418,11.657 89.418,12.457 82.775,19.1 81.4,19.1
VCC_MCU: C18.1 C19.1 C20.1 C21.1 C22.1 C23.1 C24.1 C25.1 C26.1 C27.1 C28.1 C29.1 C30.1 C31.1 FB4.2 H1.2 R46.2 R47.1 R48.1 U3.17 U3.30 U3.32 U3.33 U3.39 U3.52 U3.62 U3.72 U3.84 U3.95 U3.108 U3.121 U3.131 U3.143 U3.144 | length 340.7
  Top Layer w0.3: R47.1@20.15,42.85 18.95,44.05 18.95,46.652 19.698,47.4 v1(21,47.4) ; C30.1@29.55,31.325 29.55,31.304 29.55,29.35 27.75,27.55 27.75,26.15 28.2,25.7 29.5,25.7 31.825,28.025 C22.1@33.825,28.025 ; v2(32.5,21.25) 36.25,25 C23.1@36.25,28.025 ; v1(32.5,22.5) 33.825,23.825 C22.1@33.825,28.025 ; v1(41.2,24.7) 41.2,27.9 C24.1@41.325,28.025 C23.1@36.25,28.025 ; v1(41.5,58.3) 41.5,58.111 41.241,57.851 41.241,57.816 40.65,57.225 40.65,55.941 42.85,53.741 C20.1@42.85,50.125 ; v1(50.5,52.3) 50.311,52.3 49.752,51.742 49.742,51.742 49.35,51.35 C31.1@49.35,50.125 FB4.2@51.475,50.125 51.781,50.431 51.781,51.288 52.65,52.157 52.65,52.159 53.441,52.95 53.443,52.95 53.843,53.35 55.852,53.35 56.35,52.852 56.35,48.45 51.65,43.75 C21.1@51.65,41.825 ; v1(53.8,28) 53.8,28.189 53.242,28.748 53.242,28.758 53.025,28.975 C25.1@51.65,28.975 C26.1@51.65,31.4 55,31.4 ; v1(55,28) 55,28.85 ; R48.1@61.2,26.35 59.853,26.35 57.353,28.85 55,28.85 ; v1(61.5,47.5) 55.825,41.825 C21.1@51.65,41.825 ; v1(62.5,38.5) 59.9,38.5 ; C22.1@33.825,28.025 C23.1@36.25,28.025 ; C21.1@51.65,41.825 C27.1@51.65,36.825 54.95,36.825 56.625,38.5 59.9,38.5 ; 55,28.85 55,31.4 ; 55,31.4 55.702,31.4 59.85,35.548 59.85,38.45 59.9,38.5
  Top Layer w1: v2(21,19.498) 22.273,19.498 R46.2@22.3,19.525 ; v1(21,47.4) 22.475,47.4 27.05,42.825 C29.1@29.55,42.825 ; v1(24.5,28) 27.804,31.304 C30.1@29.55,31.304 ; v1(24.9,38) 29.375,38 C18.1@29.55,37.825 ; v1(25,53.5) 27.375,53.5 29.55,51.325 29.55,50.1 ; C30.1@29.55,31.325 C18.1@29.55,37.825 ; v1(35,55.9) 37.35,53.55 C19.1@37.35,50.125 ; C20.1@42.85,50.125 C19.1@37.35,50.125 ; C18.1@29.55,37.825 C29.1@29.55,42.825 ; C29.1@29.55,42.825 C28.1@29.55,47.825 29.55,50.1 ; 29.55,50.1 29.575,50.125 C19.1@37.35,50.125
  Mid-Bottom w0.3: v1(41.5,58.3) 47.5,52.3 v1(50.5,52.3)
  Bottom Layer w0.3: v2(21,19.498) 21,21.1 24.5,24.6 v1(24.5,28) 24.6,28.1 24.6,28.643 27.307,31.35 U3.39@29.55,31.35 ; v1(21,47.4) 21.134,47.266 21.813,47.266 26.229,42.85 26.327,42.85 U3.62@29.55,42.85 ; v1(24.9,38) 25.089,38 25.239,37.85 U3.52@29.55,37.85 ; v1(25,53.5) 25.134,53.366 25.925,53.366 29.55,49.741 U3.72@29.55,47.85 ; v2(32.5,21.25) 34.85,23.6 U3.30@34.85,28.05 ; v1(32.5,22.5) 33.35,23.35 ; U3.33@33.35,28.05 33.35,23.35 ; U3.32@33.85,28.05 33.85,23.526 33.674,23.35 33.35,23.35 ; v1(35,55.9) 35.134,55.766 35.134,55.187 37.35,52.971 U3.84@37.35,50.15 ; v1(41.2,24.7) 41.2,24.889 41.35,25.039 U3.17@41.35,28.05 ; U3.95@42.85,50.15 42.85,56.948 42.086,57.711 42.086,57.714 v1(41.5,58.3) 41.5,58.489 41.05,58.939 41.05,60.05 42.6,61.6 46.12,61.6 H1.2@47.82,59.9 ; U3.108@49.35,50.15 49.35,51.4 50.116,52.166 50.366,52.166 v1(50.5,52.3) ; U3.144@51.65,30.35 53.05,30.35 53.934,29.466 53.934,28.134 v1(53.8,28) ; U3.143@51.65,30.85 54.15,30.85 55,30 v1(55,28) ; U3.131@51.65,36.85 57.65,36.85 58.15,37.35 60.057,37.35 61.207,38.5 v1(62.5,38.5) ; U3.121@51.65,41.85 56.314,41.85 60,45.536 60,46 v1(61.5,47.5)
VCC_TFT: C12.1 C13.1 C14.1 CN3.7 CN3.47 FB3.2 R15.2 R44.2 | length 46.6
  Top Layer w0.3: v2(14.7,7.9) 14.7,8.089 14.5,8.289 C14.1@14.5,9.525 C14.1@14.775,9.525 ; CN3.7@16.5,5.2 16.5,7.8 14.875,9.425 C14.1@14.775,9.525 ; R15.2@16.925,11.475 16.711,11.475 16.344,11.109 16.344,11.094 C14.1@14.775,9.525 ; v1(35.4,8) 35.6,8 37.125,9.525 R44.2@37.4,9.525 ; CN3.47@36.5,5.2 36.5,7.4 37.4,8.3 R44.2@37.4,9.525 ; FB3.2@44.725,9.525 R44.2@37.4,9.525
  Mid-Bottom w0.3: v2(14.7,7.9) 15.95,7.9 17.4,6.45 33.85,6.45 v1(35.4,8)
VCC_W25: C50.2 FB6.2 R56.2 R57.2 R58.2 U7.8 | length 35.8
  Top Layer w0.3: FB6.2@55.802,19.975 C50.2@58.28,19.975 59.6,19.975 ; v2(59.7,17.15) 60.691,16.159 60.691,15.607 61.548,14.75 62.252,14.75 62.75,15.248 62.75,16.036 59.6,19.186 59.6,19.975 ; U7.8@60.322,20.452 60.322,20.15 60.147,19.975 59.6,19.975 ; R56.2@66.175,15.55 66.45,15.55 67.582,16.682 68.975,16.682 69.802,17.509 69.802,19.1 68.927,19.975 R58.2@68.652,19.975 67.413,19.975 ; R57.2@66.175,19.975 67.413,19.975 ; v2(67.4,21) 67.413,20.987 67.413,19.975
  Mid-Bottom w0.3: v2(59.7,17.15) 60.325,17.775 64.175,17.775 v2(67.4,21)
VCC_XPT: C59.1 C60.1 C61.1 FB9.2 R60.2 R61.2 U9.1 U9.9 U9.10 | length 31.1
  Top Layer w0.3: C60.1@44.727,13.6 C60.1@44.951,13.6 ; R61.2@47.298,18.025 47.573,18.025 49.575,16.024 49.575,14.95 ; FB9.2@47.3,11.475 47.076,11.475 C60.1@44.951,13.6 ; U9.1@49.575,13.5 U9.1@49.575,13.575 ; v1(50.8,15.8) 50.8,14.95 ; U9.10@53.475,19.975 U9.9@54.125,19.975 54.125,19.45 53.5,18.825 v2(53.5,18.7) ; R60.2@58.277,13.6 57.971,13.906 57.548,13.906 56.627,14.827 56.627,14.938 56.014,15.55 C59.1@55.8,15.55 53.953,15.55 53.353,14.95 50.8,14.95 ; C60.1@44.951,13.6 C61.1@47.302,13.6 49.55,13.6 U9.1@49.575,13.575 ; U9.1@49.575,13.575 49.575,14.95 ; 49.575,14.95 50.8,14.95
  Bottom Layer w0.3: v1(50.8,15.8) 50.8,16.927 51.723,17.85 52.65,17.85 v2(53.5,18.7)
XN: CN5.3 U9.4 | length 6.9
  Top Layer w0.3: CN5.3@50.5,7.029 50.5,9.864 51.525,10.89 U9.4@51.525,13.5
XP: CN5.1 U9.2 | length 7.2
  Top Layer w0.3: CN5.1@48.5,7.029 48.5,9.514 50.225,11.24 U9.2@50.225,13.5
YN: CN5.4 U9.5 | length 6.8
  Top Layer w0.3: CN5.4@51.5,7.029 51.5,10.039 52.175,10.715 U9.5@52.175,13.5
YP: CN5.2 U9.3 | length 7
  Top Layer w0.3: CN5.2@49.5,7.029 49.5,9.7 50.875,11.075 U9.3@50.875,13.5
pads on no net: CN3.49 CN3.50 CN4.1 CN4.2 SC1.1 SC3.1 SC4.1 U2.3 U2.9 U2.17 U2.19 U2.22 U2.23 U2.24 U2.25 U2.26 U2.27 U3.3 U3.4 U3.7 U3.8 U3.9 U3.18 U3.19 U3.20 U3.136 U3.137 U8.36 U8.40 U9.7 U9.8 U9.13

## Polygon pours and split planes (outlines as drawn)
GND_MCU on Mid-Bottom "GND_MB_1" (solid, remove dead copper, pour order 1): 0,0 0,80 100,80 100,0
GND_MCU on Bottom Layer "GND_MB_1" (solid, remove dead copper, pour order 0): 0,0 0,80 100,80 100,0
GND_MCU on Mid-Top "GND_MB_1" (solid, remove dead copper, pour order 3): 0,0 0,80 100,80 100,0
GND_MCU on Top Layer "GND_MB_1" (solid, remove dead copper, pour order 2): 0,0 0,80 100,80 100,0

## Keep-outs
Keep-Out Layer:
  the board outline again, w0.2

## Other copper
Bottom Layer:
  rectangle net GND_MCU: 84.125,18.275 85.7,19.352

## Silkscreen, mask and mechanical layers (free items; w line width, h text height)
Top Overlay:
  drawing of 125 lines, arcs and shapes, not listed
  text "CH4" at 25.05,79.9 h1.6 r180
  text "CH5" at 41.05,79.9 h1.6 r180
  text "CH6" at 57.05,79.9 h1.6 r180
  text "CH7" at 73.05,79.9 h1.6 r180
  text "CH8" at 89.05,79.9 h1.6 r180
  text "GD" at 13.604,78.632 h1.6 r180
  text "MG" at 16.159,78.632 h1.6 r180
  text "12" at 18.464,78.632 h1.6 r180
  text "LK" at 20.998,78.632 h1.6 r180
  text "LD" at 23.464,78.632 h1.6 r180
  text "GD" at 29.604,78.632 h1.6 r180
  text "MG" at 32.159,78.632 h1.6 r180
  text "12" at 34.464,78.632 h1.6 r180
  text "LK" at 36.998,78.632 h1.6 r180
  text "LD" at 39.464,78.632 h1.6 r180
  text "GD" at 45.604,78.632 h1.6 r180
  text "MG" at 48.159,78.632 h1.6 r180
  text "12" at 50.464,78.632 h1.6 r180
  text "LK" at 52.998,78.632 h1.6 r180
  text "LD" at 55.464,78.632 h1.6 r180
  text "GD" at 61.604,78.632 h1.6 r180
  text "MG" at 64.159,78.632 h1.6 r180
  text "12" at 66.464,78.632 h1.6 r180
  text "LK" at 68.998,78.632 h1.6 r180
  text "LD" at 71.464,78.632 h1.6 r180
  text "GD" at 77.604,78.632 h1.6 r180
  text "MG" at 80.159,78.632 h1.6 r180
  text "12" at 82.464,78.632 h1.6 r180
  text "LK" at 84.998,78.632 h1.6 r180
  text "LD" at 87.464,78.632 h1.6 r180
  text "NC" at 98.632,66.296 h1.6 r90
  text "NC" at 98.632,63.796 h1.6 r90
  text "+5" at 98.632,61.241 h1.6 r90
  text "CH3" at 0.1,60.55 h1.6 r270
  text "3V" at 56.883,59.583 h1.6 r270
  text "LD" at 1.368,58.964 h1.6 r270
  text "RX" at 98.632,58.859 h1.6 r90
  text "GD /  / CL /  / 3V /  / DI" at 43.9,58.604 h1.6 r270
  text "5V" at 83.881,57.143 h1.6
  text "LK" at 1.368,56.498 h1.6 r270
  text "TX" at 98.632,56.402 h1.6 r90
  text "12" at 1.368,53.964 h1.6 r270
  text "GD" at 98.632,53.796 h1.6 r90
  text "FINGER PRINT" at 99.9,52.35 h1.6 r90
  text "MG" at 1.368,51.659 h1.6 r270
  text "GD" at 1.368,49.104 h1.6 r270
  text "Charging Box / Managment Board / 8 Ch - Ver 2.0" at 54.137,47.753 h1.6
  text "CH2" at 0.1,44.55 h1.6 r270
  text "LD" at 1.368,42.964 h1.6 r270
  text "LK" at 1.368,40.498 h1.6 r270
  text "12" at 1.368,37.964 h1.6 r270
  text "MG" at 1.368,35.659 h1.6 r270
  text "GD" at 1.368,33.104 h1.6 r270
  text "H /  / B1 /  / L" at 21.471,32.05 h1.6
  text "L /  / B0 /  / H" at 57.721,29.56 h1.6
  text "CH1" at 0.1,28.55 h1.6 r270
  text "LD" at 1.368,26.964 h1.6 r270
  text "LD" at 51.934,25.715 h1.6
  text "LK" at 1.368,24.498 h1.6 r270
  text "GD     12V" at 99.9,24.362 h1.8 r90
  text "KEY1" at 92.225,22.8 h1.5
  text "12" at 1.368,21.964 h1.6 r270
  text "MG" at 1.368,19.659 h1.6 r270
  text "GD" at 1.368,17.104 h1.6 r270
  text "RST" at 21.9,16.85 h1.8
  text "KEY2" at 92.225,15.8 h1.5
  text "ISD" at 58.769,2.95 h1.6 r90
  text "SPK" at 80.742,1.35 h1.6

## Dimensions
0,0 to 0,80 on Mechanical 1
0,0 to 100,0 on Mechanical 1

## Text inside footprints (layer, text, board x,y; h text height)
C32: Bottom Overlay "-" at 20.3,51.967 h0.7 r270
C37: Bottom Overlay "-" at 55.4,57.333 h0.7 r90